# EAGLE board layout pcb (eagle) tranceiver (EAGLE 7.2.0)
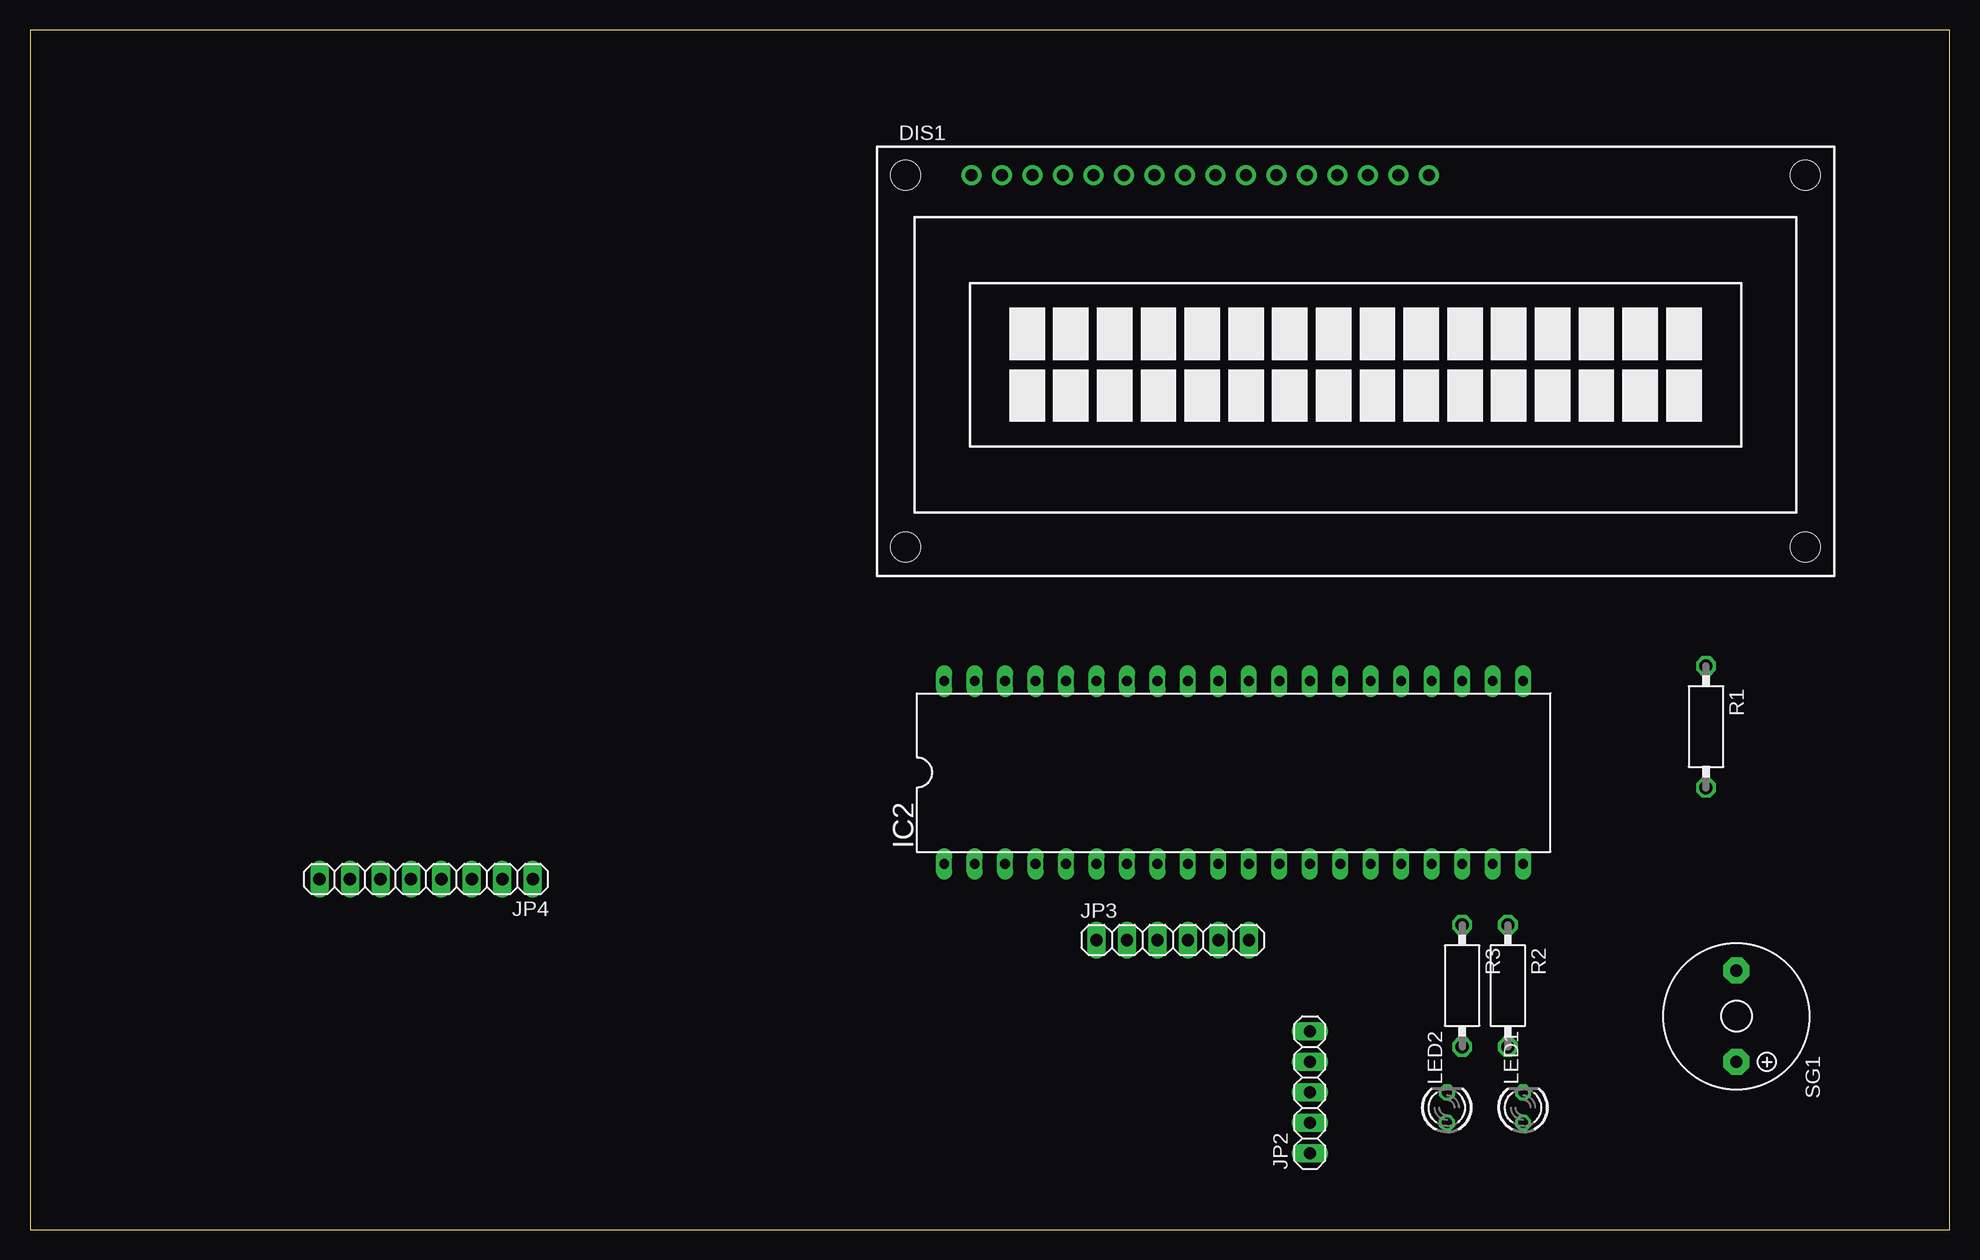
[diagram p0: board, top side]
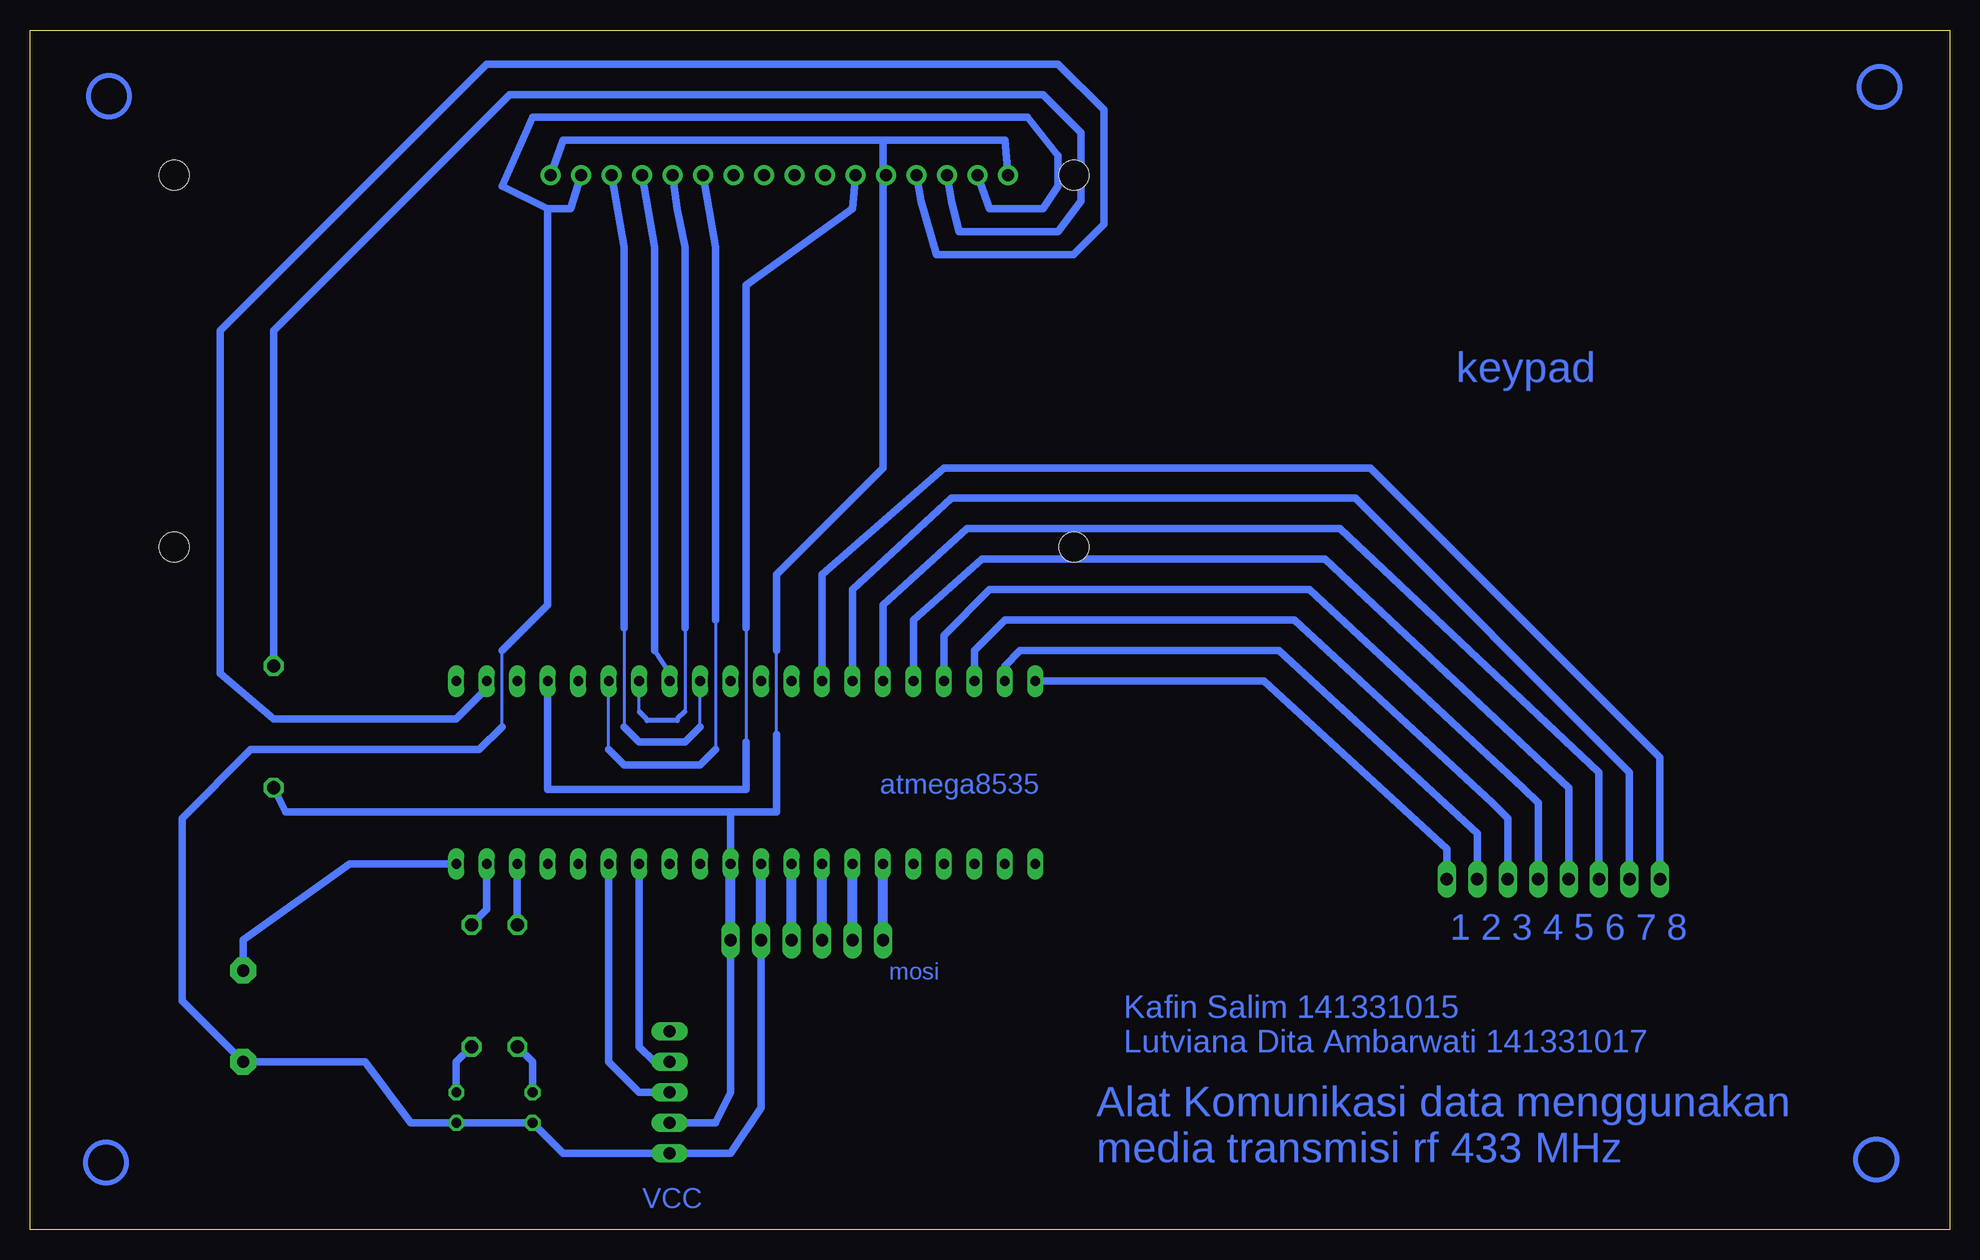
[diagram p1: board, bottom side, seen from below]

Size 160 x 100 mm. Coordinates in mm from the lower left corner, seen from the top.
Outline: 0,0 160,0 160,100 0,100 0,0
Copper layers (1*16): Top 0.035mm / dielectric 1.5mm / Bottom 0.035mm
Design rules "default": minimum track width 10mil, minimum drill 24mil, track to track 8mil, track to pad 8mil, pad to pad 8mil, via to via 8mil, smd to smd 8mil, copper to edge 40mil, drill to drill 8mil, minimum pad ring 10mil, minimum via ring 8mil, stop-mask expansion 4mil, vias tented up to drill 0mil, thermal gap 10mil

## Footprints (pad centres in the part's own frame; a part is rotated, then mirrored left to right if it is on the bottom)
TUXGR_16X2_R2 = drill 1 pad 1.676: 1 -32,15.5; 2 -29.46,15.5; 3 -26.92,15.5; 4 -24.38,15.5; 5 -21.84,15.5; 6 -19.3,15.5; 7 -16.76,15.5; 8 -14.22,15.5; 9 -11.68,15.5; 10 -9.14,15.5; 11 -6.6,15.5; 12 -4.06,15.5; 13 -1.52,15.5; 14 1.02,15.5; 15 3.56,15.5; 16 6.1,15.5 | hole 2.5: -37.5,-15.5; 37.5,-15.5; -37.5,15.5; 37.5,15.5
DIL40 = drill 0.813 long: 1 -24.13,-7.62; 2 -21.59,-7.62; 3 -19.05,-7.62; 4 -16.51,-7.62; 5 -13.97,-7.62; 6 -11.43,-7.62; 7 -8.89,-7.62; 8 -6.35,-7.62; 9 -3.81,-7.62; 10 -1.27,-7.62; 11 1.27,-7.62; 12 3.81,-7.62; 13 6.35,-7.62; 14 8.89,-7.62; 15 11.43,-7.62; 16 13.97,-7.62; 17 16.51,-7.62; 18 19.05,-7.62; 19 21.59,-7.62; 20 24.13,-7.62; 21 24.13,7.62; 22 21.59,7.62; 23 19.05,7.62; 24 16.51,7.62; 25 13.97,7.62; 26 11.43,7.62; 27 8.89,7.62; 28 6.35,7.62; 29 3.81,7.62; 30 1.27,7.62; 31 -1.27,7.62; 32 -3.81,7.62; 33 -6.35,7.62; 34 -8.89,7.62; 35 -11.43,7.62; 36 -13.97,7.62; 37 -16.51,7.62; 38 -19.05,7.62; 39 -21.59,7.62; 40 -24.13,7.62
1X05 = drill 1.016 long: 1 -5.08,0; 2 -2.54,0; 3 0,0; 4 2.54,0; 5 5.08,0
1X06 = drill 1.016 long: 1 -6.35,0; 2 -3.81,0; 3 -1.27,0; 4 1.27,0; 5 3.81,0; 6 6.35,0
1X08 = drill 1.016 long: 1 -8.89,0; 2 -6.35,0; 3 -3.81,0; 4 -1.27,0; 5 1.27,0; 6 3.81,0; 7 6.35,0; 8 8.89,0
LED3MM = drill 0.813 octagon: A -1.27,0; K 1.27,0
VMTA55 = drill 1.1 octagon: 1 -5.08,0; 2 5.08,0
F/TMB = drill 1.016 pad 2.159 octagon: + 3.81,0; - -3.81,0

## Placement (x,y rotation side)
DIS1  TUXGR_16X2_R2  [TUXGR_16X2_R2]  110.49,72.39 0 top
IC2  ATMEGA644-20PU  [DIL40]  100.33,38.1 0 top
JP2  [1X05]  106.68,11.43 90 top
JP3  [1X06]  95.25,24.13 0 top
JP4  [1X08]  33.02,29.21 180 top
LED1  TLLR4400  [LED3MM]  124.46,10.16 90 top
LED2  TLLR4400  [LED3MM]  118.11,10.16 90 top
R1  [VMTA55]  139.7,41.91 270 top
R2  [VMTA55]  123.19,20.32 270 top
R3  [VMTA55]  119.38,20.32 270 top
SG1  F/TMB  [F/TMB]  142.24,17.78 270 top

## Library data of the parts
DIS1 = display-lcd; OC_FARNELL: unknown; OC_NEWARK: unknown
IC2 = atmel; MPN: ATMEGA644-20PU; OC_FARNELL: 1288340; OC_NEWARK: 23M5060
JP2-JP4 = pinhead
LED1 LED2 = led; MF: VISHAY SEMICONDUCTOR; OC_FARNELL: 1612437
R1-R3 = resistor
SG1 = buzzer; OC_FARNELL: unknown; OC_NEWARK: unknown

## Nets
AVCC: IC2.30
GND: IC2.31
N$1: DIS1.1 DIS1.5 DIS1.16 IC2.11 JP2.2 JP3.6 R1.2
N$2: DIS1.3 R1.1
N$3: LED1.K R2.2
N$4: IC2.19 R2.1
N$5: IC2.20 SG1.-
N$6: DIS1.4 IC2.22
N$7: IC2.9 JP3.4
N$8: IC2.8 JP3.3
N$9: IC2.7 JP3.2
N$10: IC2.6 JP3.1
N$11: DIS1.2 DIS1.15 IC2.10 JP2.1 JP3.5 LED1.A LED2.A SG1.+
N$12: IC2.15 JP2.3
N$13: IC2.40 JP4.1
N$14: IC2.14 JP2.4
N$15: IC2.39 JP4.2
N$16: DIS1.6 IC2.24
N$17: DIS1.11 IC2.26
N$18: DIS1.12 IC2.27
N$19: DIS1.13 IC2.28
N$20: DIS1.14 IC2.29
N$21: LED2.K R3.2
N$22: IC2.18 R3.1
N$23: IC2.38 JP4.3
N$24: IC2.37 JP4.4
N$25: IC2.36 JP4.5
N$26: IC2.35 JP4.6
N$27: IC2.34 JP4.7
N$28: IC2.33 JP4.8

## Tracks (layer width: path | path; a pad name or v marks a point on that pad's centre or on a via)
N$1
  Bottom 0.254: 97.79,41.27 97.79,48.26 | 88.9,87.63 DIS1.5
  Bottom 0.61: 88.9,90.81 78.74,90.81 DIS1.1 | 88.9,90.81 88.9,87.63 88.9,63.5 97.79,54.61 97.79,48.26 | 88.9,90.81 115.57,90.81 DIS1.16 | JP2.2 102.87,8.89 101.6,11.43 JP3.6 | 101.6,34.8 138.68,34.8 R1.2 | IC2.11 101.6,34.8 | 97.79,41.27 97.79,34.8 101.6,34.8
  Bottom 0.813: JP3.6 IC2.11
N$2
  Bottom 0.61: R1.1 139.7,74.93 120.02,94.61 75.56,94.61 72.39,91.44 72.39,85.72 74.3,83.19 82.55,83.19 83.19,85.72 DIS1.3
N$3
  Bottom 0.61: LED1.K 124.46,13.97 R2.2
N$4
  Bottom 0.61: IC2.19 121.92,26.67 R2.1
N$5
  Bottom 0.61: IC2.20 133.35,30.48 142.24,24.13 SG1.-
N$6
  Bottom 0.61: IC2.22 121.92,45.09 124.46,42.55 139.7,42.55 144.15,46.35 144.15,74.93 121.92,97.16 74.3,97.16 70.48,93.34 70.48,83.82 73.03,81.28 84.45,81.28 85.72,85.72 DIS1.4
N$7
  Bottom 0.813: JP3.4 IC2.9
N$8
  Bottom 0.813: JP3.3 IC2.8
N$9
  Bottom 0.813: JP3.2 IC2.7
N$10
  Bottom 0.813: JP3.1 IC2.6
N$11
  Bottom 0.254: 120.65,41.91 120.65,48.26
  Bottom 0.61: 116.84,85.09 120.65,87 118.11,92.71 76.83,92.71 74.3,89.53 74.3,87 75.56,85.09 80.01,85.09 DIS1.2 | 116.84,85.09 114.94,85.09 DIS1.15 | JP3.5 99.06,10.16 101.6,6.35 JP2.1 115.57,6.35 LED2.A LED1.A 128.27,8.89 132.08,13.97 SG1.+ 147.32,19.05 147.32,34.29 141.6,40.01 122.56,40.01 120.65,41.91 | 116.84,85.09 116.84,52.07 120.65,48.26
  Bottom 0.813: JP3.5 IC2.10
N$12
  Bottom 0.61: IC2.15 111.76,13.97 109.22,11.43 JP2.3
N$13
  Bottom 0.61: JP4.1 41.91,31.75 57.15,45.72 IC2.40
N$14
  Bottom 0.254: JP2.4 107.95,13.97
  Bottom 0.61: IC2.14 109.22,15.24 107.95,13.97
N$15
  Bottom 0.61: IC2.39 78.74,46.99 77.47,48.26 55.88,48.26 39.37,33.02 JP4.2
N$16
  Bottom 0.254: 100.33,50.16 100.33,40.64
  Bottom 0.61: IC2.24 116.84,36.7 100.33,36.7 100.33,40.64 | 100.33,50.16 100.33,78.74 91.44,85.09 DIS1.6
N$17
  Bottom 0.254: 111.76,40.01 IC2.26 | 102.87,50.8 102.87,40.01
  Bottom 0.61: 111.76,40.01 110.49,38.73 104.14,38.73 102.87,40.01 | 102.87,50.8 102.87,81.92 DIS1.11
N$18
  Bottom 0.254: 108.58,42.42 108.58,42.55 | 109.22,43.18 IC2.27 | 105.41,50.16 105.41,43.18 | 106.05,42.55 106.05,42.42
  Bottom 0.406: 108.58,42.55 109.22,43.18 | 106.05,42.42 108.58,42.42 | 105.41,43.18 106.05,42.55
  Bottom 0.61: 105.41,50.16 105.41,81.92 106.05,85.09 DIS1.12
N$19
  Bottom 0.254: 106.68,46.35 IC2.28
  Bottom 0.406: 107.95,48.26 106.68,46.35
  Bottom 0.61: 107.95,48.26 107.95,81.92 DIS1.13
N$20
  Bottom 0.254: 104.14,41.91 IC2.29 | 110.49,50.16 110.49,41.91
  Bottom 0.61: 104.14,41.91 105.41,40.64 109.22,40.64 110.49,41.91 | 110.49,50.16 110.49,81.92 DIS1.14
N$21
  Bottom 0.61: LED2.K 118.11,13.97 R3.2
N$22
  Bottom 0.61: R3.1 IC2.18
N$23
  Bottom 0.61: IC2.38 81.28,48.26 78.74,50.8 54.61,50.8 38.1,35.56 36.83,34.29 JP4.3
N$24
  Bottom 0.61: IC2.37 83.82,49.53 80.01,53.34 53.34,53.34 35.56,36.83 34.29,35.56 JP4.4
N$25
  Bottom 0.61: IC2.36 86.36,50.8 80.64,55.88 52.07,55.88 31.75,36.83 JP4.5
N$26
  Bottom 0.61: IC2.35 88.9,52.07 81.92,58.42 50.8,58.42 29.21,38.1 JP4.6
N$27
  Bottom 0.61: IC2.34 91.44,53.34 83.19,60.96 49.53,60.96 26.67,38.1 JP4.7
N$28
  Bottom 0.61: IC2.33 93.98,54.61 83.82,63.5 48.26,63.5 24.13,39.37 JP4.8
(copper drawn outside any net)
  shapes: Bottom circle x4

## Text on the board
Bottom: keypad | atmega8535 | 1 2 3 4 5 6 7 8 | mosi | Kafin Salim 141331015 / Lutviana Dita Ambarwati 141331017 | Alat Komunikasi data menggunakan / media transmisi rf 433 MHz | VCC